# Altium PCB AUTOMATSKO_PODMAZIVANJE.PcbDoc
Units mm, origin at the board's own origin, x right, y up, seen from the top; angles counter-clockwise.
Board outline 73.79 x 39.12 mm, 2 copper layers (Top Layer, Bottom Layer); 65 components, 49 nets, 169 pads, 15 vias.
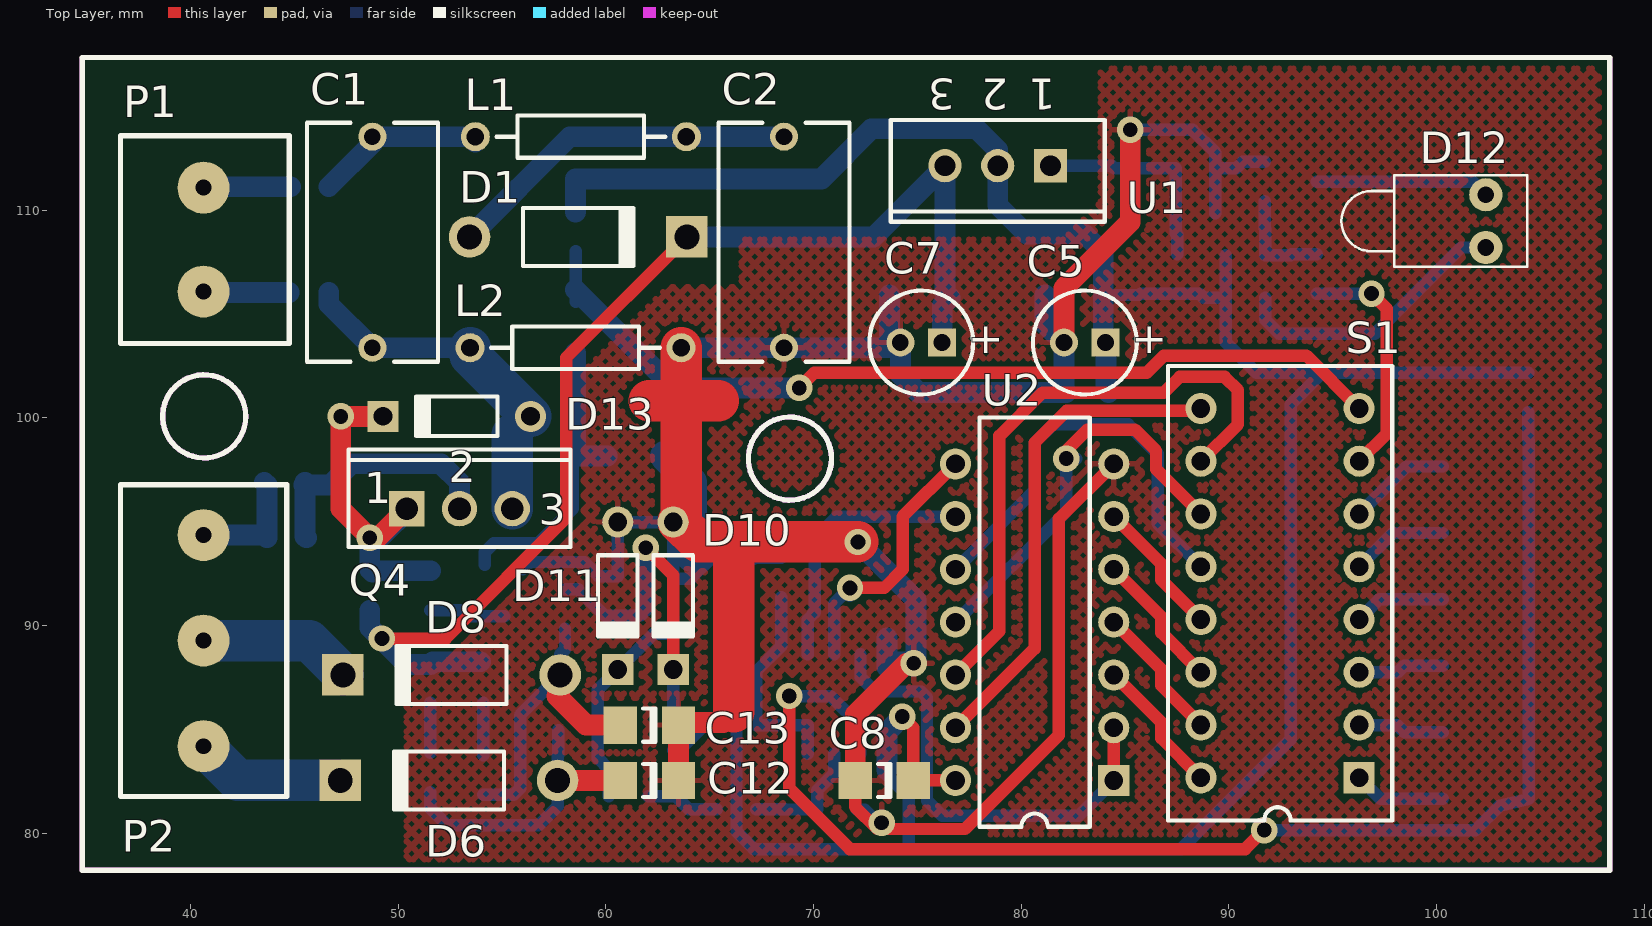
[diagram p0: Top Layer view]
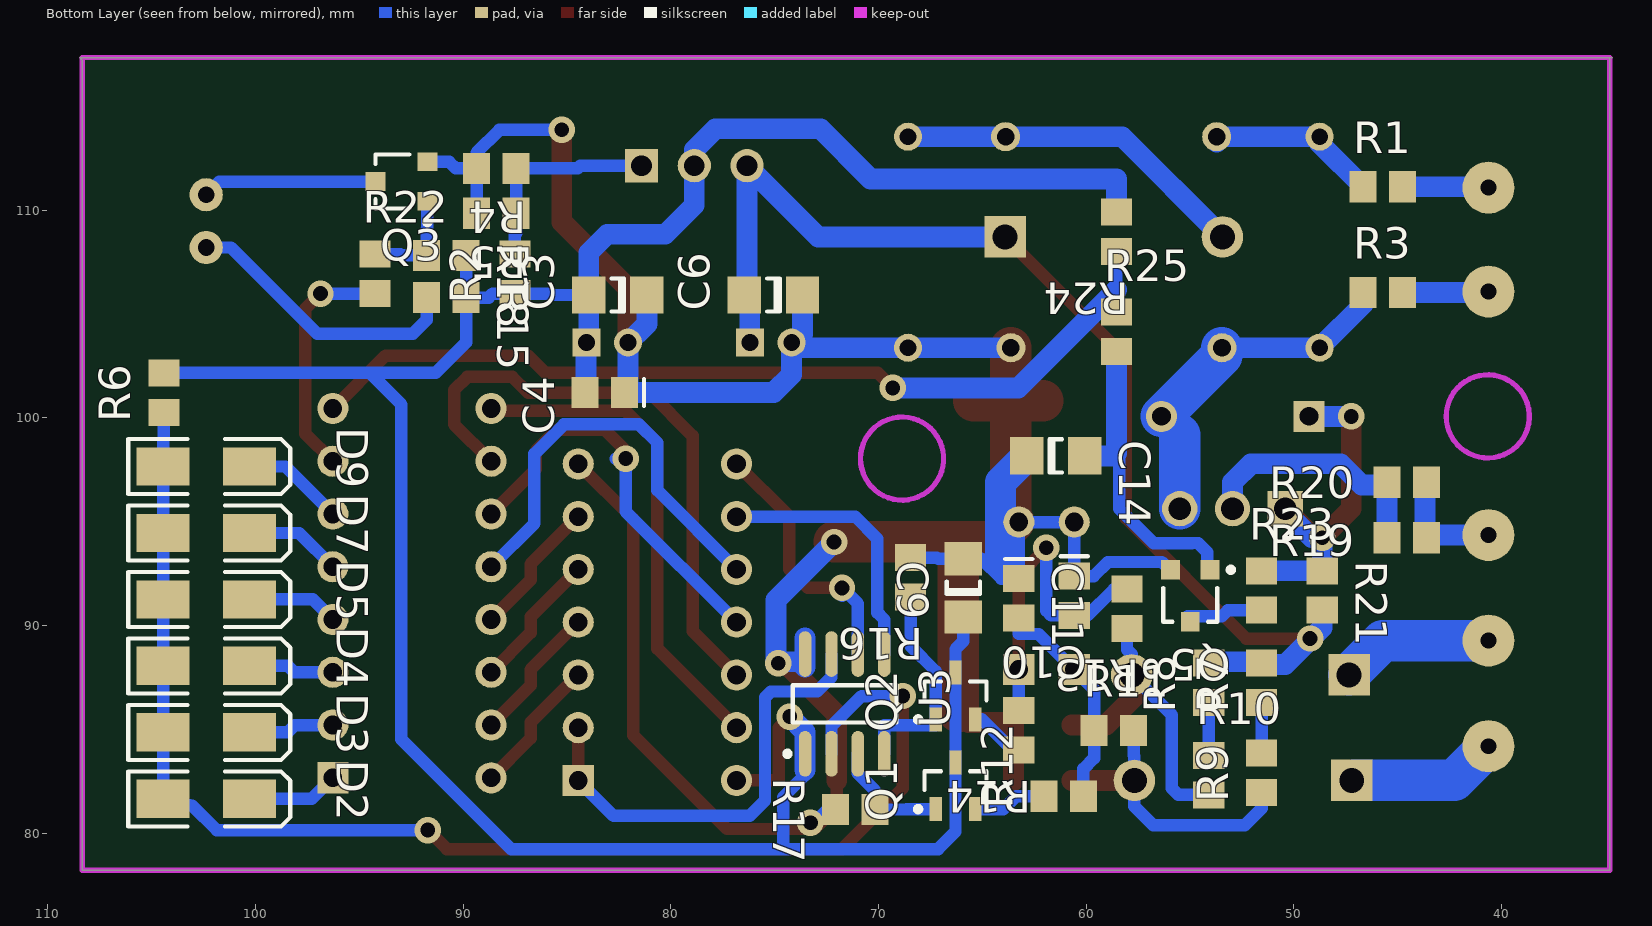
[diagram p1: Bottom Layer view, seen from below]

## Layer stack, top to bottom
Top Solder: solder mask 0.0102, Solder Resist, Dk 3.5
Top Layer: signal copper 0.0356
Dielectric1: dielectric 0.32, FR-4, Dk 4.8
Bottom Layer: signal copper 0.0356
Bottom Solder: solder mask 0.0102, Solder Resist, Dk 3.5

## Board outline
34.671,117.348 108.458,117.348 108.331,117.221 108.331,78.232 34.798,78.232 34.798,117.348

## Design rules (kind name [scope] priority, off if disabled: settings)
Clearance [All] p1: gap=0.254
PolygonConnect [All] p1: connectstyle=Relief reliefconductorwidth=0.254 reliefentries=4 polygonreliefangle="90 Angle" airgapwidth=0.254
RoutingVias [All] p1: holewidth=0.711 width=1.27 viastyle="Through Hole" minholewidth=0.711 minwidth=1.27 maxholewidth=0.711 maxwidth=1.27
SilkToSolderMaskClearance SilkscreenOverComponentPads [IsPad] p1: minsilkscreentomaskgap=0.254 clearancetoexposedcopper=TRUE
SolderMaskExpansion [All] p1: expansion=0.102
Width [All] p1: maxlimit=3 minlimit=0.254 preferedwidth=0.6
29 further rules are at their usual default settings.

## Components (designator, comment, footprint, x,y, rotation, side; value= is the part's Value field where it differs from the comment)
C1 "220nF" VP60-6.3 48.768,108.458 r90 top
C2 "220nF" VP60-6.3 68.58,108.458 r90 top
C3 "" 1206 82.55,105.918 r0 bottom
C4 "" 0805 83.185,101.219 r0 bottom
C5 "47uF/63V" CAPPR2-5X11 83.058,103.632 r180 top
C6 "" 1206 75.057,105.918 r0 bottom
C7 "47uF/63V" CAPPR2-5X11 75.184,103.632 r180 top
C8 "" 1206 73.406,82.55 r180 top
C9 "" 1206 65.913,91.821 r90 bottom
C10 "" 0805 60.579,91.44 r270 bottom
C11 "" 0805 63.246,91.313 r270 bottom
C12 "" 1206 62.103,82.55 r180 top
C13 "" 1206 62.103,85.217 r180 top
C14 "" 1206 61.468,98.171 r180 bottom
D1 "1N4007" DO-41 58.674,108.712 r0 top
D2 "1N4148" D-64 102.362,81.661 r180 bottom
D3 "1N4148" D-64 102.362,84.861 r180 bottom
D4 "1N4148" D-64 102.362,88.062 r180 bottom
D5 "1N4148" D-64 102.362,91.262 r180 bottom
D6 "1N4007" DO-41 52.451,82.55 r180 top
D7 "1N4148" D-64 102.362,94.463 r180 bottom
D8 "1N4007" DO-41 52.578,87.63 r180 top
D9 "1N4148" D-64 102.362,97.663 r180 bottom
D10 "5V1" DO-35 63.246,91.44 r270 top
D11 "5V1" DO-35 60.579,91.44 r270 top
D12 "LED_ZELENA" LED-1 102.362,109.474 r180 top
D13 "10V" DO-35 52.832,100.076 r180 top
L1 "" AXIAL-0.4 58.801,113.538 r0 top
L2 "" AXIAL-0.4 58.547,103.378 r180 top
P1 "POWER" "TERMINAL KONEKTOR 2" 40.64,108.585 r0 top
P2 "IO" "TERMINAL KONEKTOR 3" 40.64,89.281 r0 top
Q1 "BC807" SOT-23B_N 66.294,82.296 r90 bottom
Q2 "BC807" SOT-23B_N 66.294,86.614 r90 bottom
Q3 "BC817" 318-08 92.964,111.379 r90 bottom
Q4 "IRF630" TO-220AB 52.959,95.631 r0 top
Q5 "BC817" 318-08 54.991,91.44 r0 bottom
R1 "1R" ERA-0805 45.72,111.125 r180 bottom
R2 "240R" ERA-0805 87.503,106.934 r90 bottom
R3 "1R" ERA-0805 45.72,106.045 r180 bottom
R4 "2K2" ERA-0805 88.392,112.014 r0 bottom
R5 "1K" ERA-0805 88.392,109.855 r0 bottom
R6 "1K" ERA-0805 104.394,101.219 r90 bottom
R7 "820R" ERA-0805 51.562,87.249 r90 bottom
R8 "820R" ERA-0805 54.102,87.249 r90 bottom
R9 "820R" ERA-0805 51.562,82.931 r90 bottom
R10 "820R" ERA-0805 54.102,82.804 r90 bottom
R11 "10K" ERA-0805 58.674,84.963 r180 bottom
R12 "1K" ERA-0805 61.087,81.788 r0 bottom
R13 "10K" ERA-0805 58.039,90.805 r270 bottom
R14 "1K" ERA-0805 63.246,84.963 r270 bottom
R15 "330R" ERA-0805 90.805,105.791 r180 bottom
R16 "10K" ERA-0805 68.453,92.329 r270 bottom
R17 "10K" ERA-0805 71.12,81.153 r180 bottom
R18 "10K" ERA-0805 90.805,107.823 r180 bottom
R19 "1R" ERA-0805 44.577,94.234 r0 bottom
R20 "1R" ERA-0805 44.577,96.901 r0 bottom
R21 "10K" ERA-0805 48.641,91.694 r270 bottom
R22 "1K" ERA-0805 94.234,106.934 r90 bottom
R23 "47R" ERA-0805 51.562,91.694 r90 bottom
R24 "10K" ERA-0805 58.547,108.966 r270 bottom
R25 "1K" ERA-0805 58.547,104.14 r90 bottom
S1 "SW-DIP8" DIP-16-KEY 96.266,82.677 r90 top
U1 "LM317T" 221A-04 78.867,112.141 r180 top
U2 "MC74HC164N" 646-06 80.645,90.17 r90 top
U3 "PIC12F508-I/SN" SOIC-SN8_N 71.628,86.233 r90 bottom

## Footprints (in the part's own frame and the unit in brackets; to place one, negate y for a bottom-side part, rotate by r counter-clockwise, add the part's x,y. Pads: shape width x height; smd on the part's side, far side on the other; paste and mask are expansions set on the pad)
221A-04 [mm] "TO, Thru-Hole, Vertical, Heatsink Mounted; 3 In-Line Leads; Pitch 2.54 mm"
  rect 1.6x1.6 hole 1: 1(-2.54,0)
  round 1.6 hole 1: 2(0,0) 3(2.54,0)
  silkscreen extent -5.15,-2.2 5.15,2.7
318-08 [mm] "SOT-23; 3 Leads; Body 3.0 x 2.6 mm, inc. leads (LxW max)"
  rect 0.9x0.95 smd: 1(-0.95,-1.25) 2(0.95,-1.25) 3(0,1.25)
  silkscreen extent -2.07,-1.37 1.3,1.25
646-06 [mm] "DIP; 14 Leads; Row Spacing 7.62 mm; Pitch 2.54 mm"
  rect 1.5x1.5 hole 0.9: 1(-7.62,-3.81)
  round 1.5 hole 0.9: 2(-5.08,-3.81) 3(-2.54,-3.81) 4(0,-3.81) 5(2.54,-3.81) 6(5.08,-3.81) 7(7.62,-3.81) 8(7.62,3.81) 9(5.08,3.81) 10(2.54,3.81) 11(0,3.81) 12(-2.54,3.81) 13(-5.08,3.81) 14(-7.62,3.81)
  silkscreen extent -9.85,-2.65 9.85,2.65
0805 [mm] "Chip Capacitor; Body 2.0 x 1.2 mm (LxW typ)"
  rect 1.3x1.5 smd: 1(-0.95,0) 2(0.95,0)
  silkscreen extent -1.9,-0.65 -1.9,0.65
1206 [mm] "Chip Capacitor; Body 3.2 x 1.6 mm (LxW typ)"
  rect 1.6x1.8 smd: 1(-1.4,0) 2(1.4,0)
  silkscreen extent -0.3,-0.8 0.3,0.8
AXIAL-0.4 [mm] "Axial Device, Thru-Hole; 2 Leads; 0.4 in Pin Spacing"
  round 1.4 hole 0.85: 1(-5.08,0) 2(5.08,0)
  silkscreen extent -4.06,-1.02 4.06,1.02
CAPPR2-5X11 [mm] "Capacitor, Electrolytic, Radial; Body 5 x 11 mm (Dia.xH typ); Pin Spacing 2 mm (typ)"
  rect 1.35x1.35 hole 0.8: 1(-1,0)
  round 1.35 hole 0.8: 2(1,0)
  silkscreen extent -2.5,-2.5 2.5,2.5
D-64 [mm] "DO-214-AC/SMA; 2 C-Bend Leads; Body 5.3 x 2.6 mm, inc. leads (LxW)"
  rect 2.55x1.85 smd: 1(-2.075,0) 2(2.075,0)
  silkscreen extent -3.75,-1.33 4.05,1.33
DIP-16-KEY [mm] "DIP; 16 Leads; Row Spacing 7.62 mm; Pitch 2.54 mm"
  rect 1.5x1.5 hole 0.9: 1(0,0)
  round 1.5 hole 0.9: 2(2.54,0) 3(5.08,0) 4(7.62,0) 5(10.16,0) 6(12.7,0) 7(15.24,0) 8(17.78,0) 9(17.78,7.62) 10(15.24,7.62) 11(12.7,7.62) 12(10.16,7.62) 13(7.62,7.62) 14(5.08,7.62) 15(2.54,7.62) 16(0,7.62)
  silkscreen extent -2.05,-1.59 19.83,9.2
DO-35 [mm] "Diode, Axial; Body 3.8 x 1.9 mm (LxDia. max), Lead Dia. 0.53 mm (max)"
  round 1.5 hole 0.9: 1(-3.55,0)
  rect 1.5x1.5 hole 0.9: 2(3.55,0)
  silkscreen extent -1.95,-0.95 2.05,0.95
DO-41 [mm] "Diode, Axial; Body 5.2 x 2.7 mm (LxDia. max), Lead Dia. 0.86 mm (max)"
  round 2 hole 1.2: 1(-5.23,0)
  rect 2x2 hole 1.2: 2(5.23,0)
  silkscreen extent -2.65,-1.4 2.75,1.4
ERA-0805 [mm] "Chip Resistor; Body 2 x 1.3 mm (LxW typ)"
  rect 1.3x1.5 smd: 1(-0.95,0) 2(0.95,0)
LED-1 [mm] "LED; 2 Leads"
  round 1.6 hole 0.8: 1(0,1.27) 2(0,-1.27)
  silkscreen extent -2,-2.2 6.95,2.2
SOIC-SN8_N [mm] "SOIC, 8-Leads, Body 4.9x3.8mm, Pitch 1.27mm, IPC Medium Density"
  oval 2.2x0.6 smd: 1(-2.4,1.905) 2(-2.4,0.635) 3(-2.4,-0.635) 4(-2.4,-1.905) 5(2.4,-1.905) 6(2.4,-0.635) 7(2.4,0.635) 8(2.4,1.905)
  silkscreen extent -2.52,-2.5 0.9,2.88, body extent -2,-2.5 2,2.5, height 1.75
SOT-23B_N [mm] "SOT23, 3-Leads, Body 2.9x1.3mm, Pitch 0.95mm, Lead Span 2.4mm, IPC Medium Density"
  rect 1.15x0.6 smd: 1(-1.125,0.95) 2(-1.125,-0.95) 3(1.125,0)
  silkscreen extent -1.25,-1.5 0.7,1.93, body extent -0.7,-1.5 0.7,1.5, height 1.14
"TERMINAL KONEKTOR 2" [mm] "Konektor 2 pina"
  round 2.5 hole 0.762: 1(0,-2.5) 2(0,2.5)
  silkscreen extent -4,-5 4.13,5
"TERMINAL KONEKTOR 3" [mm] "Konektor 3 pina"
  round 2.5 hole 0.762: 1(0,5.08) 2(0,0) 3(0,-5.08)
  silkscreen extent -4,-7.5 4,7.5
TO-220AB [mm] "TO, Thru-Hole, Vertical, Heatsink Mounted; 3 In-Line Leads; Pitch 2.54 mm"
  rect 1.7x1.7 hole 1.1: 1(-2.54,0)
  round 1.7 hole 1.1: 2(0,0) 3(2.54,0)
  silkscreen extent -5.35,-1.85 5.35,2.85
VP60-6.3 [mm] "Capacitor, Ceramic, Thru-Hole, Dipped Radial; Body 11.5 x 6.3 mm (WxT) Pin Spacing 10.16 mm (typ)"
  round 1.35 hole 0.8: 1(-5.08,0) 2(5.08,0)
  silkscreen extent -5.75,-3.15 5.75,3.15

## Part data
C1 C2: library part VP60BY565MB, "Dipped Radial Multilayer Ceramic Capacitor X7R: 5.6uF, 100V"
C3 C6 C8 C9 C12 C13 C14: library part C1206, "Ceramic Chip Capacitor - Standard"
C4 C10 C11: library part C0805, "Ceramic Chip Capacitor - Standard"
C5 C7: library part EKA00AA322C00, "Aluminum Electrolytic Capacitor, Radial Style with Long Leads: 220uF, 10V"
D1 D6 D8: library part "Diode 1N4007", "1 Amp General Purpose Rectifier"
D2 D3 D4 D5 D7 D9: library part Diode, "Default Diode"
D10 D11 D13: library part "D Zener", "Zener Diode"
D12: library part LED1, "Typical RED GaAs LED"
L1 L2: library part "Inductor Iron", "Magnetic-Core Inductor"
P1: library part CON, "KONEKTOR 2 PINA"
P2: library part "TERMINAL KONEKTOR 3 PINA", "TERMINAL KONEKTOR 3"
Q1 Q2: library part PNP, "PNP Bipolar Transistor"
Q3 Q5: library part BC817-16LT1, "General Purpose Transistor NPN Silicon"
Q4: library part SUP75N06-08, "N-Channel 60V (D-S), 175'C  MOSFET"
R1 R2 R3 R4 R5 R6 R7 R8 R9 R10 R11 R12 R13 R14 R15 R16 R17 R18 R19 R20 R21 R22 R23 R24 R25: library part ERA6Y, "Rectangular Thick Film Chip Resistor, 10 Ohm to 1M Ohm Range, 0.1% and 0.5% Tolerance, 0805 Size, 0.1 W"
S1: "4009 Series DIP Switch, Raised actuator"
U1: "3-Terminal Adjustable Positive Voltage Regulator"
U2: "8-Bit Serial-Input/Parallel-Output Shift Register"
U3: "8-bit Flash Microcontroller, 512 (x12-Bit words) Program Memory, 25 Bytes Data Memory, 8-Pin SOIC, Industrial Temperature"

## Via types
v1: diameter 1.27, hole 0.711, Top Layer to Bottom Layer, 15 vias

## Nets (pads, with @x,y where several pads share a name; then routed paths per layer and width w, separated by ;. In a path a pad name is that pad's centre, name@x,y a point inside that pad or via, vN(x,y) a via of type N, cw(c..) or ccw(c..) an arc to the next point about the centre after c; other vN are vias at no path point)
+5: C3.2 C4.2 C5.1 C8.1 C9.1 Q1.3 Q2.3 R2.1 R6.2 R15.2 R18.2 R24.1 U1.2 U2.14 U3.1 | length 134.5
  Top Layer w0.6: v1(74.27,85.623) 74.806,85.087 C8.1 U2.14
  Bottom Layer w0.6: C9.1 65.913,89.256 66.294,88.875 Q2.3 Q1.3 66.294,80.086 67.132,79.248 74.403,79.248 ; U3.1@73.533,82.804 74.595,81.742 ; v1@74.27,85.293 v1(74.27,85.623) ; 74.595,81.615 74.595,79.44 74.403,79.248 ; C3.2 85.674,105.918 85.74,105.984 R2.1 88.57,105.984 88.763,105.791 R15.2 ; R18.2 R15.2 ; R6.2 94.488,102.169 ; 74.403,79.248 87.681,79.248 92.964,84.531 92.964,100.645 94.488,102.169 ; R15.2 89.855,103.632 91.318,102.169 94.488,102.169
  Bottom Layer w1: R24.1 58.547,111.506 70.383,111.506 72.796,113.919 77.851,113.919 78.867,112.903 U1.2 78.867,110.236 80.264,108.839 83.058,108.839 83.947,107.95 C3.2@83.947,106.045 ; U3.1@73.533,83.058 73.533,84.887 v1(74.27,85.623) ; C3.2 83.95,103.629 84.074,103.505 84.074,101.346 C4.2@84.201,101.219
+24: C6.2 C7.1 D1.2 R7.2 R8.2 R21.2 U1.3 | length 57
  Top Layer w0.6: v1(49.225,89.383) 52.299,89.383 58.09,95.174 58.09,102.898 D1.2
  Bottom Layer w0.6: R7.2 R7.2@51.623,88.199
  Bottom Layer w1: R21.2 48.641,89.916 50.419,88.138 51.562,88.138 51.623,88.199 51.689,88.265 R8.2@53.975,88.265 ; D1.2 72.898,108.712 U1.3 76.327,106.045 76.581,105.791 76.2,105.41 C7.1@76.2,103.505
NetC1_2: C1.2 L1.1 R1.1 | length 8.3
  Bottom Layer w1: R1.1 48.768,113.223 C1.2 53.467,113.538 L1.1@53.721,113.284
NetC2_2: C2.2 D1.1 L1.2 | length 17.1
  Bottom Layer w1: D1.1 58.27,113.538 L1.2 C2.2
NetC10_2: C10.2 D10.2 R13.1 R14.1 | length 15.9
  Top Layer w0.6: v1(61.925,93.751) 63.246,92.431 D10.2
  Bottom Layer w0.6: R13.1 58.674,91.755 59.939,90.49 C10.2 61.697,90.49 61.925,90.719 v1(61.925,93.751) ; R14.1 D10.2
NetC11_2: C11.2 D11.2 R11.1 R12.1 | length 10.8
  Bottom Layer w0.6: R12.1 60.137,83.109 59.624,83.622 R11.1 59.624,86.935 D11.2 62.289,89.6 63.246,89.6 C11.2
NetC12_2: C12.2 D6.1 R9.1 R11.2 | length 14.5
  Top Layer w1: D6.1@57.531,82.55 D6.1 C12.2
  Bottom Layer w0.6: R9.1 51.562,81.204 52.375,80.391 56.769,80.391 57.681,81.303 D6.1 57.681,83.718 57.724,83.761 R11.2
NetC13_2: C13.2 D8.1 R10.1 R13.2 | length 15.1
  Top Layer w1: D8.1@57.785,87.503 57.785,86.741 57.658,86.614 59.055,85.217 C13.2
  Bottom Layer w0.6: R10.1 55.565,81.854 55.88,82.169 55.88,85.702 D8.1 57.808,88.621 58.039,88.852 R13.2
NetC14_2: C14.2 Q5.1 R25.1 | length 19.8
  Bottom Layer w0.6: Q5.1@54.168,92.944 54.168,93.531 54.617,93.98 54.91,93.98 54.917,93.973 56.762,93.973 58.42,95.631 58.42,103.124 R25.1@58.547,103.251
  Bottom Layer w1: R25.1@58.547,103.124 58.547,98.298 58.674,98.171 C14.2
NetD2_1: D2.1 D3.1 D4.1 D5.1 D7.1 D9.1 R6.1 U3.2 | length 66.1
  Top Layer w0.6: v1(68.834,86.614) 68.834,82.169 71.755,79.248 90.78,79.248 v1(91.694,80.162)
  Bottom Layer w0.6: v1(68.834,86.614) 70.815,86.614 72.263,85.166 U3.2 ; v1(91.694,80.162) 101.854,80.162 103.022,81.331 D2.1 D3.1 D4.1 D5.1 D7.1 D9.1 104.437,98.933 104.394,98.976 R6.1
NetD2_2: D2.2 S1.1 | length 4.4
  Bottom Layer w0.6: S1.1 97.282,81.661 D2.2
NetD3_2: D3.2 S1.2 | length 4.2
  Bottom Layer w0.6: S1.2 98.095,85.217 98.45,84.861 D3.2
NetD4_2: D4.2 S1.3 | length 4.1
  Bottom Layer w0.6: S1.3 98.12,87.757 98.425,88.062 D4.2
NetD5_2: D5.2 S1.4 | length 4.4
  Bottom Layer w0.6: S1.4 97.231,91.262 D5.2
NetD6_2: D6.2 P2.3 | length 7.2
  Bottom Layer w2: P2.3 42.291,82.55 D6.2@47.117,82.55
NetD7_2: D7.2 S1.5 | length 4.7
  Bottom Layer w0.6: S1.5 97.892,94.463 D7.2
NetD8_2: D8.2 P2.2 | length 7.4
  Bottom Layer w2: P2.2 45.72,89.281 D8.2@47.371,87.63
NetD9_2: D9.2 S1.6 | length 5
  Bottom Layer w0.6: S1.6 98.552,97.663 D9.2
NetD12_1: D12.1 R15.1 | length 13.7
  Bottom Layer w0.6: R15.1 91.755,104.714 92.407,104.062 97.027,104.062 101.168,108.204 D12.1
NetD12_2: D12.2 Q3.3 | length 8.4
  Bottom Layer w0.6: Q3.3 101.727,111.379 D12.2
NetD13_2: D13.2 Q4.1 R21.1 R23.2 | length 19.9
  Top Layer w1: D13.2@49.276,100.076 v1(47.244,100.076) 47.244,95.631 v1(48.641,94.234) 49.022,94.234 Q4.1
  Bottom Layer w0.6: R21.1 R21.1@48.707,92.644
  Bottom Layer w1: v1(47.244,100.076) D13.2@49.276,100.076 ; R21.1@48.768,92.583 R21.1@48.707,92.644 ; Q4.1@50.546,95.631 49.149,94.234 v1(48.641,94.234) 48.641,92.71 R21.1@48.707,92.644 ; R23.2 R21.1@48.707,92.644
NetP1_1: P1.1 R3.2 | length 4.1
  Bottom Layer w1: P1.1@40.64,106.045 R3.2
NetP1_2: P1.2 R1.2 | length 4
  Bottom Layer w1: P1.2@40.807,111.125 R1.2@44.831,111.125
NetP2_1: P2.1 R19.1 R20.1 | length 5.8
  Bottom Layer w1: P2.1 43.561,94.361 43.688,94.234 43.688,96.774 R20.1@43.561,96.901
NetQ1_1: Q1.1 R17.2 U3.3 | length 6
  Bottom Layer w0.6: Q1.1 68.638,81.171 68.656,81.153 R17.2 70.17,82.067 70.993,82.89 U3.3
NetQ1_2: Q1.2 R12.2 | length 3.6
  Bottom Layer w0.6: R12.2 63.373,81.788 63.99,81.171 Q1.2
NetQ2_1: Q2.1 R16.2 U3.4 | length 10.5
  Bottom Layer w0.6: R16.2 68.453,89.017 67.244,87.808 Q2.1 67.244,85.217 69.723,85.217 U3.4
NetQ2_2: Q2.2 R14.2 | length 2.7
  Bottom Layer w0.6: R14.2 63.551,84.013 65.027,85.489 Q2.2
NetQ3_1: Q3.1 R18.1 R22.2 | length 5.1
  Bottom Layer w0.6: Q3.1 91.714,109.134 91.755,109.093 R18.1 92.964,107.823 93.025,107.884 R22.2
NetQ4_2: Q4.2 R19.2 R20.2 | length 12.6
  Bottom Layer w0.6: R19.2 R19.2@45.593,94.234
  Bottom Layer w1: R20.2@45.466,96.774 R20.2@45.527,96.774 ; R20.2 R20.2@45.527,96.774 ; R19.2@45.593,94.234 45.527,94.3 R20.2@45.527,96.774 ; Q4.2@52.959,95.377 52.959,96.901 52.07,97.79 47.752,97.79 46.736,96.774 R20.2@45.527,96.774
NetQ5_3: Q5.3 R23.1 | length 3.7
  Bottom Layer w0.6: R23.1 53.188,90.744 53.488,90.444 Q5.3@55.118,90.444
NetR2_2: R2.2 R4.1 R5.1 U1.1 | length 10.2
  Bottom Layer w0.6: U1.1 84.353,112.141 84.48,112.014 R4.1 R5.1 87.442,108.9 87.503,108.839 R2.2
NetR7_1: R7.1 R9.2 | length 2.4
  Bottom Layer w0.6: R9.2 R7.1
NetR8_1: R8.1 R10.2 | length 2.5
  Bottom Layer w0.6: R10.2 R8.1
NetR22_1: R22.1 S1.7 | length 11.5
  Top Layer w0.6: S1.7 97.587,99.238 97.587,105.258 v1(96.86,105.984)
  Bottom Layer w0.6: R22.1 v1(96.86,105.984)
NetR24_2: R24.2 R25.2 S1.8 | length 43.8
  Top Layer w0.6: v1(69.317,101.448) 70.034,102.165 86.038,102.165 86.87,102.997 93.726,102.997 S1.8
  Bottom Layer w0.6: R25.2@58.547,105.598 R24.2
  Bottom Layer w1: 58.547,106.172 63.271,101.448 v1(69.317,101.448)
NetS1_9: S1.9 U2.13 | length 24
  Top Layer w0.6: U2.13 80.645,88.9 80.645,98.806 82.179,100.34 88.196,100.34 88.196,100.457 S1.9
NetS1_10: S1.10 U2.12 | length 29.5
  Top Layer w0.6: U2.12 78.943,89.738 78.943,99.136 81.026,101.219 86.868,101.219 87.63,101.981 89.789,101.981 90.424,101.346 90.424,99.695 S1.10
NetS1_11: S1.11 U2.11 | length 20
  Top Layer w0.6: v1(82.169,98.044) 82.169,98.425 83.185,99.441 85.471,99.441 86.487,98.425 86.487,97.536 S1.11
  Bottom Layer w0.6: U2.11 82.169,95.504 v1(82.169,98.044) v1@82.652,98.044
NetS1_12: S1.12 U2.10 | length 20.8
  Bottom Layer w0.6: U2.10 80.645,96.52 80.645,98.806 81.534,99.695 85.141,99.695 86.563,98.273 86.563,94.92 S1.12
NetS1_13: S1.13 U2.6 | length 6.7
  Top Layer w0.6: U2.6 86.741,92.964 86.741,92.202 S1.13
NetS1_14: S1.14 U2.5 | length 6.7
  Top Layer w0.6: U2.5 86.741,90.424 86.741,89.662 S1.14
NetS1_15: S1.15 U2.4 | length 6.7
  Top Layer w0.6: U2.4 86.741,87.884 86.741,87.122 S1.15
NetS1_16: S1.16 U2.3 | length 6.7
  Top Layer w0.6: U2.3 86.741,85.344 86.741,84.582 S1.16
NetU2_1: U2.1 U2.2 U3.7 | length 22.2
  Top Layer w0.6: U2.1 U2.2
  Bottom Layer w0.6: U3.7 72.263,87.528 72.958,86.833 75.184,86.833 75.463,86.554 75.463,81.585 76.2,80.848 82.753,80.848 U2.1
NetU2_8: U2.8 U3.6 | length 12.9
  Top Layer w0.6: v1(71.755,91.821) 73.406,91.821 74.295,92.71 74.295,95.25 U2.8
  Bottom Layer w0.6: U3.6 70.993,91.059 v1(71.755,91.821) v1@71.755,91.44
NetU2_9: U2.9 U3.5 | length 12.9
  Bottom Layer w0.6: U3.5 69.723,90.297 70.053,90.627 70.053,94.183 71.12,95.25 U2.9
VSS: C2.1 C3.1 C4.1 C5.2 C6.1 C7.2 C8.2 C9.2 C10.1 C11.1 C12.1 C13.1 C14.1 D10.1 D11.1 L2.1 Q3.2 Q5.2 R4.2 R5.2 R16.1 R17.1 U2.7 U3.8 | length 154
  Top Layer w0.6: C8.2@72.009,82.55 C8.2 72.006,81.28 73.073,80.213 77.292,80.213 81.813,84.734 81.813,95.148 U2.7 ; v1@74.473,88.189 v1(74.828,88.189)
  Top Layer w1: C12.1 C13.1 ; C13.1@63.503,85.341 63.5,85.344 65.659,85.344 66.167,85.852 ; C8.2@72.009,82.55 72.009,85.725 v1@74.473,88.189 ; C5.2@82.058,103.505 C5.2 82.058,106.248 85.242,109.433 v1(85.242,113.868)
  Top Layer w2: 62.103,100.838 63.627,100.838 ; D10.1@63.5,94.996 64.465,94.031 v1(72.136,94.031) ; D10.1@63.627,95.377 63.627,100.838 ; L2.1 63.627,100.838 ; 65.405,100.838 63.627,100.838 ; 66.167,85.852 66.167,93.98
  Bottom Layer w0.6: Q5.2@56.007,92.71 56.363,93.066 58.964,93.066 59.639,92.39 C10.1 D11.1 D10.1 C11.1 64.084,92.263 65.042,93.221 C9.2 67.132,93.221 67.19,93.279 R16.1 ; R17.1 72.466,81.153 73.279,80.34 v1(73.279,80.518) ; C7.2@74.057,103.378 C7.2@74.184,103.505 ; C4.1@82.169,101.219 C4.1 ; v1(85.242,113.868) 88.25,113.868 89.342,112.776 R4.2 ; R5.2 R4.2 ; Q3.2 90.663,112.329 90.348,112.014 R4.2
  Bottom Layer w1: L2.1 C2.1 C7.2@74.057,103.378 ; v1(72.136,94.031) 74.93,91.237 v1@74.93,88.138 ; U3.8@73.533,89.408 U3.8 73.533,88.011 73.787,88.265 v1@74.803,88.265 ; C6.1 73.657,104.032 74.184,103.505 74.184,102.083 75.048,101.219 82.169,101.219 82.058,101.33 C5.2@82.058,103.505 ; C3.1 81.15,104.524 C5.2@82.169,103.505
  Bottom Layer w1.5: C14.1 64.135,96.904 64.135,93.345
VSS_OUT: C1.1 D13.1 L2.2 Q4.3 R3.1 | length 16.7
  Top Layer w0.6: L2.2@53.467,102.991 L2.2
  Bottom Layer w1: R3.1 46.67,105.476 C1.1 L2.2
  Bottom Layer w2: L2.2 53.467,102.997 56.388,100.076 D13.1@56.385,100.073 ; Q4.3 55.499,99.187

## Polygon pours and split planes (outlines as drawn)
VSS on Top Layer "Bottom Layer-No Net" (hatched 45Degree grid 0.508 track 0.3, pour order 3): 108.331,117.348 83.82,117.348 83.82,110.363 82.423,108.966 82.042,108.585 68.326,108.585 66.548,108.585 66.548,106.299 62.992,106.299 59.436,102.743 58.928,102.235 58.928,96.139 58.928,94.869 52.578,88.519 52.197,88.138 50.419,88.138 50.419,78.232 108.331,78.232 108.331,117.348

## Keep-outs
Keep-Out Layer:
  circle w0.254: c40.672,100.076 r2
  circle w0.254: c68.866,98.044 r2
  lines w0.254: 34.798,78.232 108.331,78.232 108.331,117.348 36.449,117.348 34.798,117.348 34.798,78.232

## Silkscreen, mask and mechanical layers (free items; w line width, h text height)
Top Overlay:
  circle w0.254: c68.866,98.044 r2
  circle w0.254: c40.672,100.076 r2
  lines w0.254: 34.798,78.232 108.331,78.232 108.331,117.348 34.798,117.348 34.798,78.232

## Text inside footprints (layer, text, board x,y; h text height)
C5: Top Overlay "+" at 87.033,104.382 h1.5 r180
C7: Top Overlay "+" at 79.159,104.382 h1.5 r180
Q4: Top Overlay "1" at 48.387,95.885 h1.5; Top Overlay "2" at 52.451,96.901 h1.5; Top Overlay "3" at 56.769,94.869 h1.5
U1: Top Overlay "1" at 81.657,116.316 h1.5 r180; Top Overlay "2" at 79.367,116.316 h1.5 r180; Top Overlay "3" at 76.827,116.316 h1.5 r180